# EAGLE board Pure LFO (EAGLE 7.6.0)
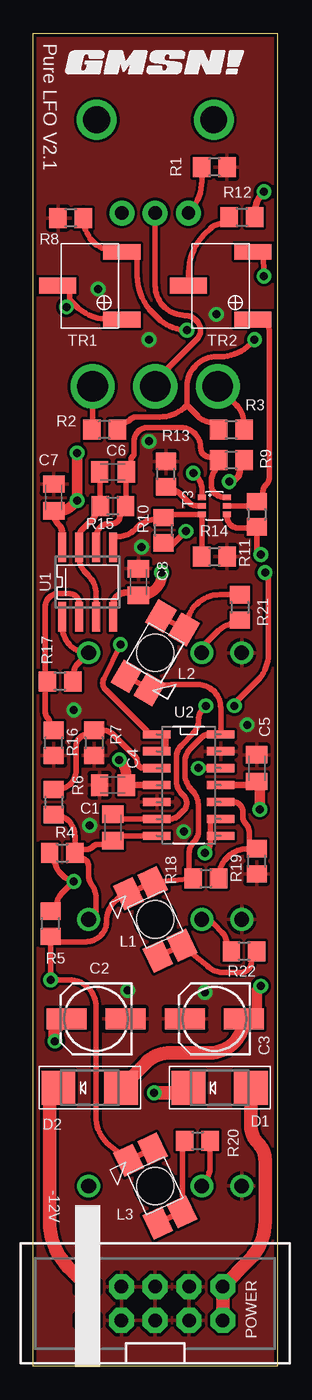
[diagram p0: board, top side]
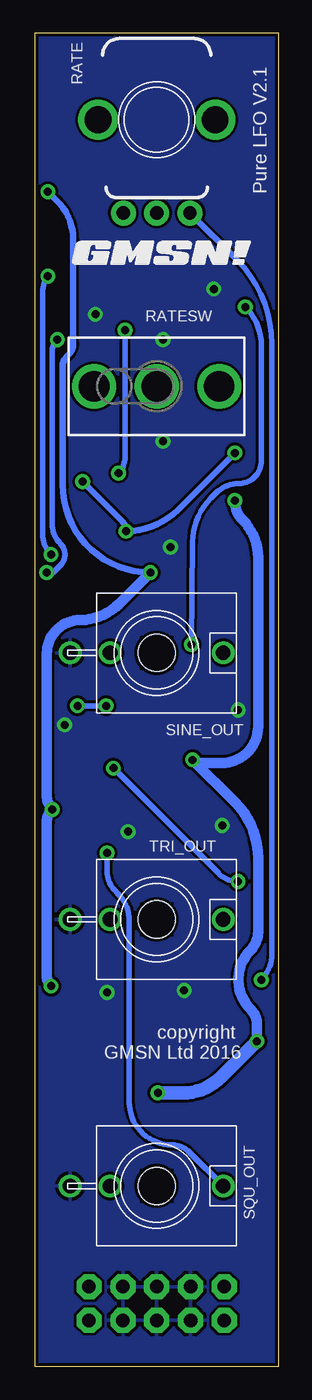
[diagram p1: board, bottom side, seen from below]

Size 18.32 x 100 mm. Coordinates in mm from the lower left corner, seen from the top.
Outline: 18.32,0 0,0 0,100 18.32,100 18.32,0
Copper layers (1*16): Top 0.035mm / dielectric 1.5mm / Bottom 0.035mm
Design rules "SparkFun": minimum track width 8mil, minimum drill 20mil, track to track 8mil, track to pad 8mil, pad to pad 8mil, via to via 8mil, smd to smd 8mil, copper to edge 10mil, drill to drill 8mil, minimum pad ring 12mil, minimum via ring 10mil, stop-mask expansion 4mil, vias tented up to drill 25mil, thermal gap 10mil

## Footprints (pad centres in the part's own frame; a part is rotated, then mirrored left to right if it is on the bottom)
C0805K = smd 1.3 x 1.6: 1 -1,0; 2 1,0
153CLV-0505 = smd 3 x 1.6: + 2.2,0; - -2.2,0
SMADIODE = smd 2.54 x 2.54: A 2.349,0; C -2.349,0
2X5-SHROUDED = drill 1.016 pad 1.88 octagon: 1 -1.27,5.08; 2 1.27,5.08; 3 -1.27,2.54; 4 1.27,2.54; 5 -1.27,0; 6 1.27,0; 7 -1.27,-2.54; 8 1.27,-2.54; 9 -1.27,-5.08; 10 1.27,-5.08
LSG_T77K = smd 2 x 1.6: 1 -2.6,-1; 2 2.6,-1; 3 2.6,1; 4 -2.6,1 | hole 2.8: 0,0
R0805 = smd 1.3 x 1.5: 1 -0.95,0; 2 0.95,0
Q-POT = drill 1 pad 1.88: P$1 -2.5,-7; P$2 0,-7; P$3 2.5,-7 | drill 2 pad 2.68: P$4 -4.4,0; P$5 4.4,0
TOGGLE_ON_OFF_ON = drill 2.3: 1 -4.7,0; 2 0,0; 3 4.7,0
S_JACK = drill 1.1: GND 0,-6.5; NORM 0,-3.5; TIP 0,5
TRANS_PAIR = smd 0.42 x 0.6: B1 0,-0.95; B2 -0.65,-0.95; C1 0.65,-0.95; C2 -0.65,0.95; E1 0.65,0.95; E2 0,0.95
TRIM_3269W = smd 1.19 x 2.79: 1 2.54,2.414; 2 0,-2.414; 3 -2.54,2.414
DUAL_OPAMP = smd 2.2 x 0.6: 1OUT -2.6,1.905; 2OUT 2.6,0.635; +1IN -2.6,-0.635; +2IN 2.6,-1.905; +VCC 2.6,1.905; -1IN -2.6,0.635; -2IN 2.6,-0.635; -VCC -2.6,-1.905
QUAD_OPAMP = smd 2.057 x 0.61: 1+IN -2.419,1.27; 1-IN -2.419,2.54; 1OUT -2.419,3.81; 2+IN -2.419,-1.27; 2-IN -2.419,-2.54; 2OUT -2.419,-3.81; 3+IN 2.381,-1.27; 3-IN 2.381,-2.54; 3OUT 2.381,-3.81; 4+IN 2.381,1.27; 4-IN 2.381,2.54; 4OUT 2.381,3.81; VCC++ -2.419,0; VCC-- 2.381,0

## Placement (x,y rotation side)
C1  5n1F  [C0805K]  5.99,40.42 270 top
C2  10u  [153CLV-0505]  4.71,26.05 180 top
C3  10u  [153CLV-0505]  13.61,26.05 180 top
C4  0.1u  [C0805K]  5.99,43.59 180 top
C5  0.1u  [C0805K]  16.78,44.86 270 top
C6  100p  [C0805K]  5.99,67.09 180 top
C7  0.1u  [C0805K]  1.54,65.19 90 top
C8  0.1u  [C0805K]  7.89,58.83 270 top
D1  [SMADIODE]  14,20.89 0 top
D2  [SMADIODE]  4.24,20.89 0 top
JP1  M05X2SHD  [2X5-SHROUDED]  9.16,4.7 90 top
L1  LED_RG_SMD_REV  [LSG_T77K]  9.16,33.52 295 top
L2  LED_RG_SMD_REV  [LSG_T77K]  9.16,53.52 60 top
L3  LED_RG_SMD_REV  [LSG_T77K]  9.16,13.52 295 top
R1  100R***  [R0805]  13.61,89.95 180 top
R2  3M3  [R0805]  5.35,70.27 180 top
R3  3K3***  [R0805]  14.88,70.27 0 top
R4  12K  [R0805]  2.17,38.52 0 top
R5  33K  [R0805]  1.3,33.2 90 top
R6  1K3  [R0805]  1.54,42.33 270 top
R7  3K3  [R0805]  4.56,46.77 270 top
R8  2K  [R0805]  2.81,86.14 180 top
R9  10K  [R0805]  14.88,67.96 180 top
R10  10K  [R0805]  9.79,62.72 90 top
R11  402R  [R0805]  16.78,63.91 270 top
R12  10K  [R0805]  15.67,86.22 0 top
R13  2K  [R0805]  9.95,66.93 90 top
R14  10K  [R0805]  13.61,60.74 0 top
R15  10K  [R0805]  5.99,64.55 0 top
R16  empty  [R0805]  1.54,46.77 90 top
R17  10K  [R0805]  2.02,51.37 180 top
R18  56K***  [R0805]  12.97,36.61 0 top
R19  20K  [R0805]  16.78,37.88 90 top
R20  empty  [R0805]  12.34,16.93 0 top
R21  empty  [R0805]  15.51,56.93 270 top
R22  empty  [R0805]  15.83,31.13 180 top
RATE  B100K  [Q-POT]  9.16,93.52 0 bottom
RATESW  [TOGGLE_ON_OFF_ON]  9.16,73.52 0 bottom
SINE_OUT  [S_JACK]  9.16,53.52 270 bottom
SQU_OUT  [S_JACK]  9.16,13.52 270 bottom
T3  TRANS_PAIR  [TRANS_PAIR]  13.61,64.55 270 top
TR1  100K  [TRIM_3269W]  4.24,81.06 270 top
TR2  100K  [TRIM_3269W]  14.08,81.06 270 top
TRI_OUT  [S_JACK]  9.16,33.52 270 bottom
U1  DUAL_OPAMP  [DUAL_OPAMP]  4.08,58.83 90 top
U2  QUAD_OPAMP  [QUAD_OPAMP]  11.7,43.59 0 top
U$1  [GMSN!_LOGO]  9.4,97.73 0 top
U$2  [GMSN!_LOGO]  8.53,83.44 0 bottom

## Library data of the parts
C1-C8 R1-R22 = rcl
D1 D2 = adafruit
JP1 = SparkFun-Connectors
L1-L3 RATE RATESW SINE_OUT SQU_OUT TR1 TR2 TRI_OUT U1 U2 = INSTRUO
T3 = QuBit
U$1 U$2 = gmsnLogo

## Nets
+12V: C2.+ C4.1 C7.1 D1.C R9.1 R10.1 U1.+VCC U2.VCC++
-12V: C3.- C5.2 C8.2 D2.A R12.2 U1.-VCC U2.VCC--
GND: C2.- C3.+ C4.2 C5.1 C7.2 C8.1 JP1.3 JP1.4 JP1.5 JP1.6 JP1.7 JP1.8 R1.1 R7.2 R8.2 R13.2 R14.2 R16.1 R19.1 SINE_OUT.GND SQU_OUT.GND TRI_OUT.GND U2.2+IN U2.4-IN
L_SIN: R21.2 SINE_OUT.NORM
L_SQU: R20.2 SQU_OUT.NORM
L_TRI: R22.2 TRI_OUT.NORM
N$1: R1.2 RATE.P$1
N$2: RATE.P$2 RATESW.2
N$3: R3.2 RATESW.1
N$4: R2.2 RATESW.3
N$5: R18.2 R19.2 U2.3+IN
N$6: C1.1 R2.1 R3.1 U2.2-IN
N$7: C1.2 R4.2 R6.2 TRI_OUT.TIP U2.2OUT
N$8: SQU_OUT.TIP U2.3-IN U2.3OUT
N$9: R4.1 R5.2 U2.4+IN
N$11: D1.A JP1.9 JP1.10
N$13: L1.1 L1.4 L2.1 L2.4 L3.1 L3.4 R5.1 R18.1 RATE.P$3 U2.4OUT
N$15: L1.2 L1.3 R22.1
N$16: L2.2 L2.3 R21.1
N$17: L3.2 L3.3 R20.1
N$21: R11.1 T3.E2 TR2.1
N$25: R8.1 T3.B2 TR1.3
N$26: R11.2 T3.E1 TR2.3
N$27: R12.1 TR2.2
N$28: R13.1 T3.B1
N$32: C6.1 R9.2 R15.2 T3.C2 U1.-2IN
N$33: TR1.1 TR1.2 U2.1-IN U2.1OUT
N$34: R10.2 R14.1 T3.C1 U1.+2IN
N$35: R6.1 R7.1 U2.1+IN
N$38: R16.2 R17.2 U1.-1IN
N$50: D2.C JP1.1 JP1.2
SINE: R17.1 SINE_OUT.TIP U1.1OUT
SINE_PRE: C6.2 R15.1 U1.2OUT U1.+1IN

## Tracks (layer width: path | path; a pad name or v marks a point on that pad's centre or on a via)
+12V  (via drill 0.6)
  Top 0.5: U2.VCC++ C4.1 | U1.+VCC 2.17,62.5 arc45 1.9,63.16 arc-45 1.54,64.03 C7.1 | v11.46,62.64 10.51,61.69 R10.1 | v14.72,66.38 arc90 15.51,67.17 15.51,67.65 R9.1
  Top 0.8: v6.46,45.5 arc-45 6.99,44.24 C4.1 | C7.1 1.99,64.19 arc45 2.9,64.56 v3.29,64.95 v3.29,68.52 | v1.62,24.39 1.54,24.54 1.54,25.18 1.62,25.1 C2.+
  Top 1.016: D1.C 11.26,20.5 v9.08,20.5
  Bottom 0.5: v3.29,68.52 7.53,64.27 arc45 v11.46,62.64 arc-45 11.8,63.46 v14.72,66.38
  Bottom 0.8: v3.29,64.95 3.29,64.88 arc-45 2.72,63.5 arc45 1.54,60.66 1.54,47.99 arc90 4.27,45.26 6.22,45.26 v6.46,45.5 3.3,42.34 arc45 1.54,38.09 1.54,32.6 arc45 2.1,31.23 arc-90 2.1,26.78 arc45 1.62,25.6 v1.62,24.39
  Bottom 1.016: v9.08,20.5 7.23,20.5 arc-45 4.29,21.71 v1.62,24.39
-12V  (via drill 0.6)
  Top 0.5: U2.VCC-- 16.51,43.59 C5.2 | U1.-VCC 5.99,57.08 arc-90 6.94,58.04 7.68,58.04 C8.2 | v17.34,88.12 arc45 16.62,86.39 R12.2
  Top 0.8: v17.02,41.77 17.02,43.63 C5.2 | v9.64,59.55 9.64,59.34 arc-45 9.22,58.34 arc-45 8,57.83 C8.2 | v17.1,28.51 16.78,28.2 16.78,26.13 16.7,26.05 C3.-
  Top 1.016: D2.A 8.43,22.73 arc-45 10.31,23.51 13.27,23.51 arc90 C3.-
  Bottom 0.5: v9.64,59.55 arc90 16.22,66.14 16.22,75.04 arc45 15.95,75.7 15.81,75.84 arc-45 15.43,76.75 15.43,84.53 arc-45 16.63,87.42 v17.34,88.12
  Bottom 0.8: v17.1,28.51 arc45 17.41,29.28 17.41,40.81 arc45 v17.02,41.77 17.02,41.85 arc45 17.41,42.81 17.41,53.48 arc90 14.91,55.98 arc-45 12,57.18 v9.64,59.55
GND  (via drill 0.6)
  other vias: 7.1,28.2 12.89,28.04 11.3,40.1 16.07,48.12 4.24,40.58 8.13,61.45 8.68,69.39 4.87,80.82 8.68,77.01 13.76,78.92 3.05,49.23
  pour Top: 18.32,100 0,100 0,0 18.32,0
  pour Bottom: 18.32,100 0,100 0,0 18.32,0
L_SIN
  Top 0.4: SINE_OUT.NORM arc-45 12.94,54.2 13.92,55.18 arc-45 15.27,55.74 R21.2
L_SQU
  Top 0.4: R20.2 13.29,15.03 arc-45 SQU_OUT.NORM
L_TRI
  Top 0.4: R22.2 14.56,31.45 14.56,31.61 arc45 14.16,32.56 13.59,33.13 arc45 TRI_OUT.NORM
N$1
  Top 0.4: R1.2 12.65,88.92 arc-45 RATE.P$1
N$2
  Top 0.4: RATESW.2 8.76,73.52 12.3,77.05 arc90 12.3,78.4 12.19,78.51 arc45 11.39,78.84 arc-90 9.16,81.07 RATE.P$2
N$3
  Top 0.4: R3.2 15.82,70.76 arc45 15.26,72.12 RATESW.1
N$4
  Top 0.4: RATESW.3 4.46,70.33 R2.2
N$5
  Top 0.4: R18.2 R18.2 arc-90 16.14,38.83 R19.2 16.22,39.39 16.22,40.04 arc45 15.96,40.69 arc-45 15.75,41.19 15.75,41.59 arc90 15.02,42.33 U2.3+IN
N$6  (via drill 0.6)
  Top 0.4: R3.1 13.93,70.34 13.45,70.82 arc-45 12.36,71.27 11.54,72.09 | R2.1 6.06,70.5 6.06,70.82 6.77,70.82 arc45 7.32,71.05 arc-45 7.73,71.22 9.48,71.22 arc45 11.51,72.06 11.54,72.09 | v12.97,49.55 12.78,49.36 arc45 12.41,48.48 arc-45 11.99,47.46 11.12,46.58 arc45 10.75,45.69 10.75,43.97 arc45 11.18,42.92 11.29,42.81 arc-90 11.29,41.68 10.96,41.35 arc-45 10.25,41.05 U2.2-IN 6.35,41.05 C1.1 | v15.11,49.55 arc-45 15.23,49.82 16.85,51.44 arc45 17.65,53.39 17.65,59.47 v17.41,59.55 | v16.62,77.01 16.29,76.68 arc-45 14.02,75.74 13.79,75.74 arc90 11.54,73.5 11.54,72.09
  Bottom 0.4: v12.97,49.55 v15.11,49.55 | v17.41,59.55 16.94,59.55 16.38,60.11 arc-90 16.38,61.69 arc45 17.02,63.24 17.02,76.05 arc45 v16.62,77.01
N$7
  Top 0.4: U2.2OUT 6.35,39.78 C1.2 5.7,39.42 5.43,39.15 4.89,39.15 arc45 4.46,38.97 arc-45 3.93,38.75 3.36,38.75 R4.2 | R6.2 arc-90 3.13,39.79 R4.2 | R4.2 | R4.2 3.52,38.12 arc-90 4.16,37.48 4.16,36.78 arc35 4.35,36.19 4.42,36.07 arc-35 4.71,35.15 4.71,34.08 arc-90 TRI_OUT.TIP
N$8  (via drill 0.6)
  Top 0.4: v12.89,38.52 13.06,38.68 arc45 13.29,39.24 13.29,39.78 U2.3OUT 13.37,39.78 13.29,39.86 13.29,41.13 14,41.13 U2.3-IN
  Bottom 0.4: v12.89,38.52 12.89,37.11 arc-45 12.32,35.72 12.08,35.49 arc45 11.22,33.41 11.22,19.81 arc-90 8.02,16.61 arc45 6.7,16.06 SQU_OUT.TIP
N$9  (via drill 0.6)
  Top 0.4: R5.2 1.23,34.22 1.23,34.23 1.78,34.23 1.78,34.63 arc-45 2.11,35.44 v3.05,36.37 2.97,36.45 arc-45 2.29,36.73 2.01,37.01 arc-45 1.62,37.96 1.23,38.35 R4.1 | U2.4+IN v12.41,44.86
  Bottom 0.4: v12.41,44.86 4.54,36.99 arc-45 v3.05,36.37
N$11
  Top 1.016: JP1.9 JP1.10 16.2,7.93 arc45 17.41,10.87 17.41,15.43 arc45 16.86,16.76 arc-45 16.35,18 D1.A
N$13  (via drill 0.6)
  Top 0.4: L3.4 L3.1 5.55,16.72 arc-45 4.71,18.73 4.71,26.97 arc90 2.69,28.99 v1.3,28.99 R5.1 1.46,32.25 1.86,31.85 3.98,31.85 arc90 5.51,33.37 arc-77 L1.1 L1.4 R18.1 11.7,36.93 11.7,38.42 arc-45 12.1,39.39 arc45 12.41,40.15 12.41,41.99 arc45 11.9,43.24 arc-45 11.38,44.48 11.38,45.34 arc-45 11.78,46.29 12.68,47.19 arc-45 13.19,47.41 U2.4OUT 14.08,49.39 arc90 12.34,51.14 10.37,51.14 arc45 8.29,50.27 arc203 L2.1 L2.4
  Bottom 0.4: RATE.P$3 3.12,82.98 arc45 0.51,76.68 0.51,30.91 arc45 v1.3,28.99
N$15
  Top 0.4: R22.1 16.78,31.05 16.38,30.66 16.38,30.33 arc-90 15.6,29.55 14.21,29.55 arc-45 13.08,30.01 L1.3 L1.2
N$16
  Top 0.4: L2.3 L2.2 arc34 11.54,55.74 arc-82 14,57.88 R21.1
N$17
  Top 0.4: R20.1 11.38,16.69 11.22,16.53 11.22,12.8 arc45 11.88,11.21 L3.3 L3.2
N$21
  Top 0.4: T3.E2 16.46,64.55 R11.1 16.94,64.86 17.26,65.19 17.26,65.6 arc-45 17.46,66.11 arc45 17.73,66.75 17.73,77.51 arc9 17.68,78.1 17.57,78.76 17.57,78.12 17.26,78.44 16.57,78.44 TR2.1
N$25  (via drill 0.6)
  Top 0.4: R8.1 arc90 6.3,83.6 TR1.3 6.73,83.68 7.18,83.68 7.81,83.04 7.81,81.82 arc45 8.96,79.03 9.37,78.62 arc45 v11.54,77.73 | 3.76,86.7 R8.1 | R8.1 | T3.B2 12.65,65.85 arc45 12.29,66.74 v12.02,67.01
  Bottom 0.4: v12.02,67.01 arc-45 11.54,68.16 v11.54,77.73
N$26  (via drill 0.6)
  Top 0.4: T3.E1 14.55,63.73 arc90 15.4,62.88 16.7,62.88 R11.2 16.78,61.22 v17.1,60.9 | TR2.3 17.29,83.55 v17.34,81.77
  Bottom 0.4: v17.34,81.77 arc-36 17.73,80.54 17.73,62.43 arc-45 v17.1,60.9
N$27
  Top 0.4: TR2.2 11.67,82.03 arc-45 12.87,84.92 13.29,85.35 arc-45 14.24,85.74 R12.1
N$28
  Top 0.4: T3.B1 12.28,64.55 arc-45 11.7,64.79 11.05,65.44 arc45 10.31,65.74 10.19,65.74 R13.1
N$32
  Top 0.4: U1.-2IN 4.71,62.24 arc-90 5.67,63.2 5.87,63.2 arc90 6.54,63.87 6.54,64.16 R15.2 6.99,64.6 C6.1 7.33,67.44 7.33,67.93 arc-45 7.47,68.26 arc45 7.57,68.51 7.57,69.41 arc-90 8.58,70.42 11.06,70.42 arc-90 12.57,68.91 arc90 13.28,68.2 13.53,68.2 13.93,67.8 R9.2 13.76,67.8 13.76,67.33 arc45 13.37,66.37 13.37,66.15 arc90 14.31,65.2 T3.C2
N$33  (via drill 0.6)
  Top 0.4: TR1.1 5.79,78.52 arc-45 3.14,79.62 2.73,80.03 | 2.73,80.03 2.73,80.9 2.65,80.98 1.9,80.98 TR1.2 | v2.49,79.47 2.73,79.71 2.73,80.03 | U2.1-IN 9.95,46.14 9.95,47.41 U2.1OUT 8.53,47.41 8.53,47.64 5.45,50.72 arc-71 5.3,51.6 v6.54,54.15
  Bottom 0.4: v6.54,54.15 6.46,61.81 arc45 5.09,65.13 4.72,65.5 arc45 2.99,66.22 arc-90 1.3,67.9 1.3,76.6 arc-45 v2.49,79.47
N$34
  Top 0.4: R14.1 T3.C1 10.1,63.9 R10.2 9.72,63.52 9.13,63.52 arc45 7.82,62.97 7.59,62.74 arc-45 6.4,62.25 5.99,62.25 U1.+2IN
N$35
  Top 0.4: U2.1+IN 8.29,44.86 arc-90 7.81,45.35 arc45 7.65,45.74 6.04,47.35 arc45 5.15,47.72 4.08,47.72 R7.1 4.24,47.41 4.11,47.41 arc90 3.21,46.5 3.21,44.67 arc-90 1.82,43.28 R6.1
N$38
  Top 0.4: U1.-1IN 3.45,57.23 arc90 2.71,57.96 1.87,57.96 arc90 0.91,56.99 0.91,51.53 R17.2 0.91,51.21 0.91,49.05 arc45 1.06,48.68 arc-45 1.22,48.28 1.22,48.04 R16.2
N$50
  Top 1.016: JP1.1 JP1.2 2.67,7.38 arc-45 1.22,10.88 1.22,20.42 1.7,20.89 D2.C
SINE
  Top 0.4: U1.1OUT 2.17,55.5 arc90 SINE_OUT.TIP 3.39,52.75 arc45 2.97,51.72 R17.1
SINE_PRE
  Top 0.4: U1.+1IN 4.71,57.93 arc45 4.13,59.34 3.92,59.55 arc-45 3.45,60.69 U1.2OUT 3.45,62.25 arc-45 3.66,62.78 4.57,63.69 arc45 4.71,64.05 4.71,64.23 R15.1 5.04,67.04 C6.2

## Text on the board
tPlace: Pure LFO V2.1 | TR1 | TR2 | T3 | L2 | L1 | -12V | L3 | POWER
bPlace: RATE | Pure LFO V2.1 | copyright / GMSN Ltd 2016